# EAGLE board matherBoard (EAGLE 9.3.1)
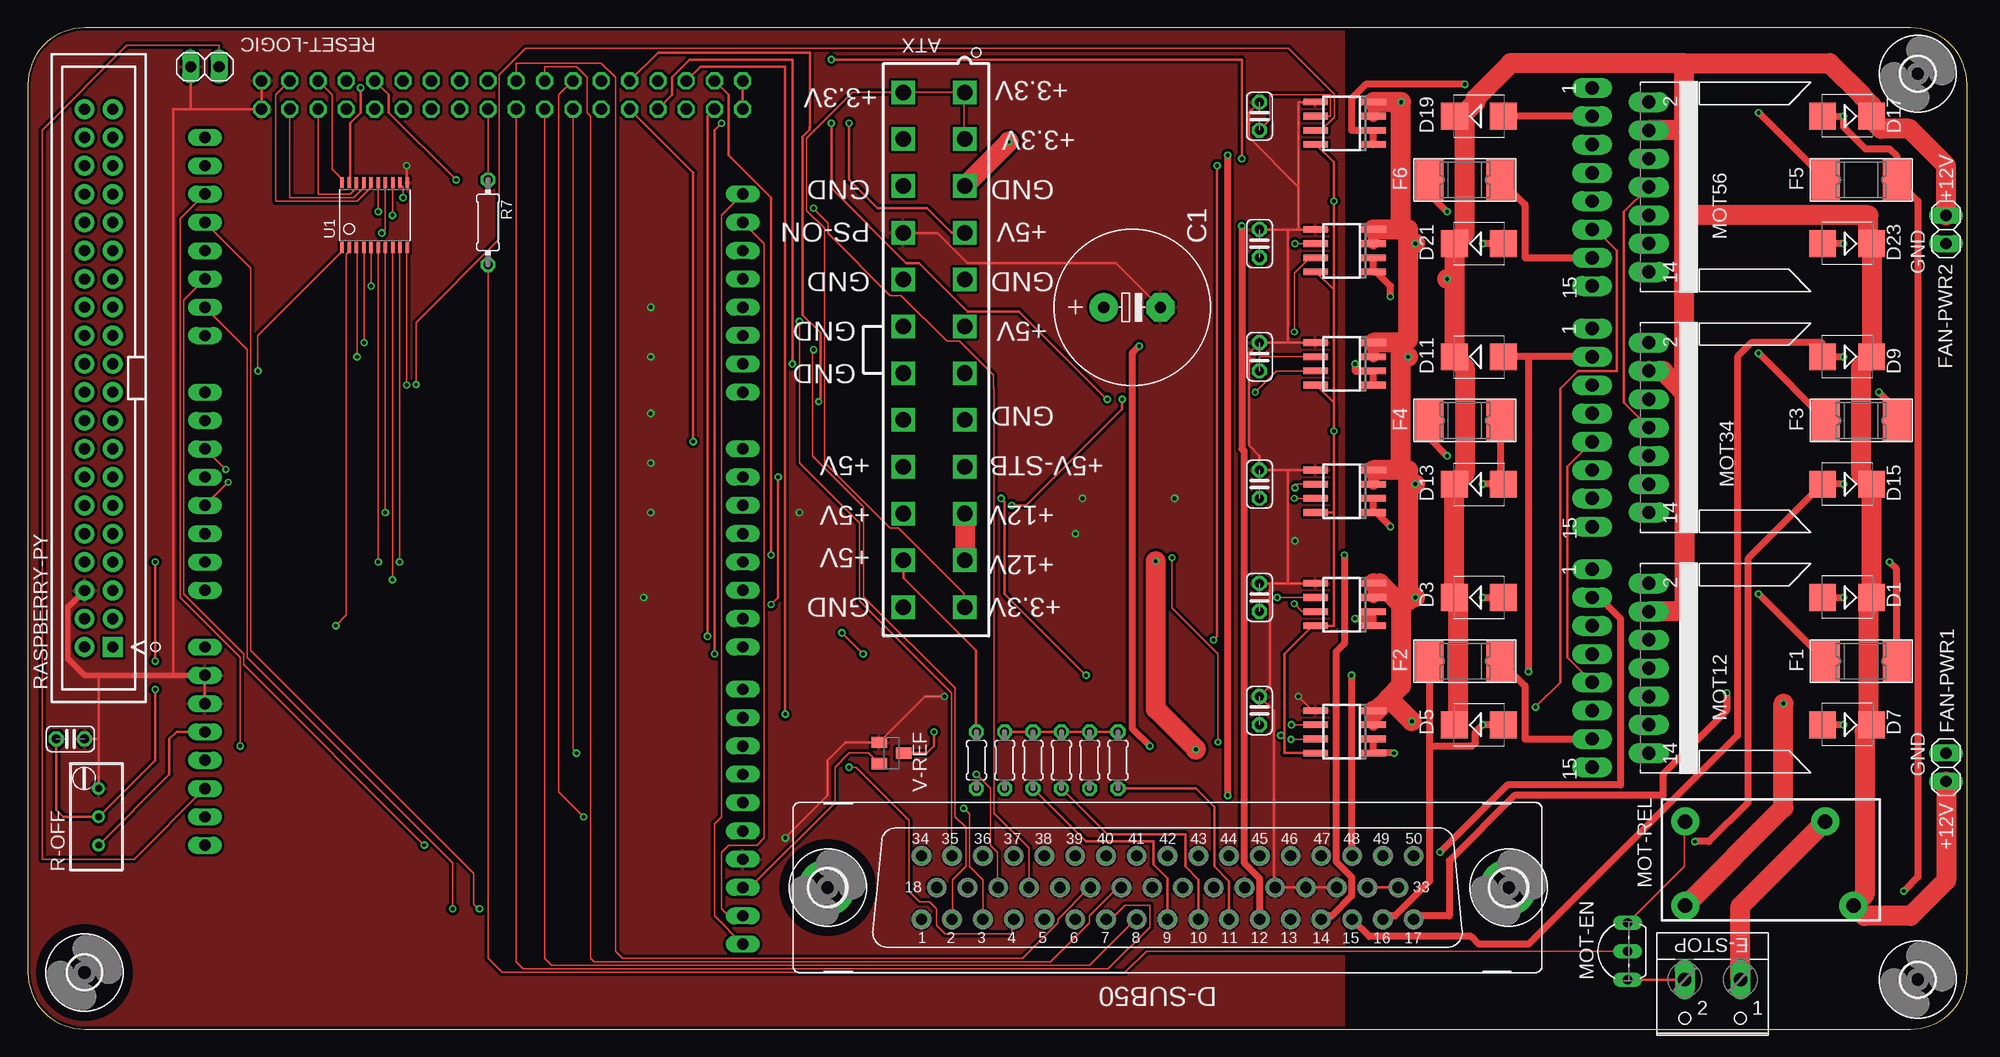
[diagram p0: board, top side]
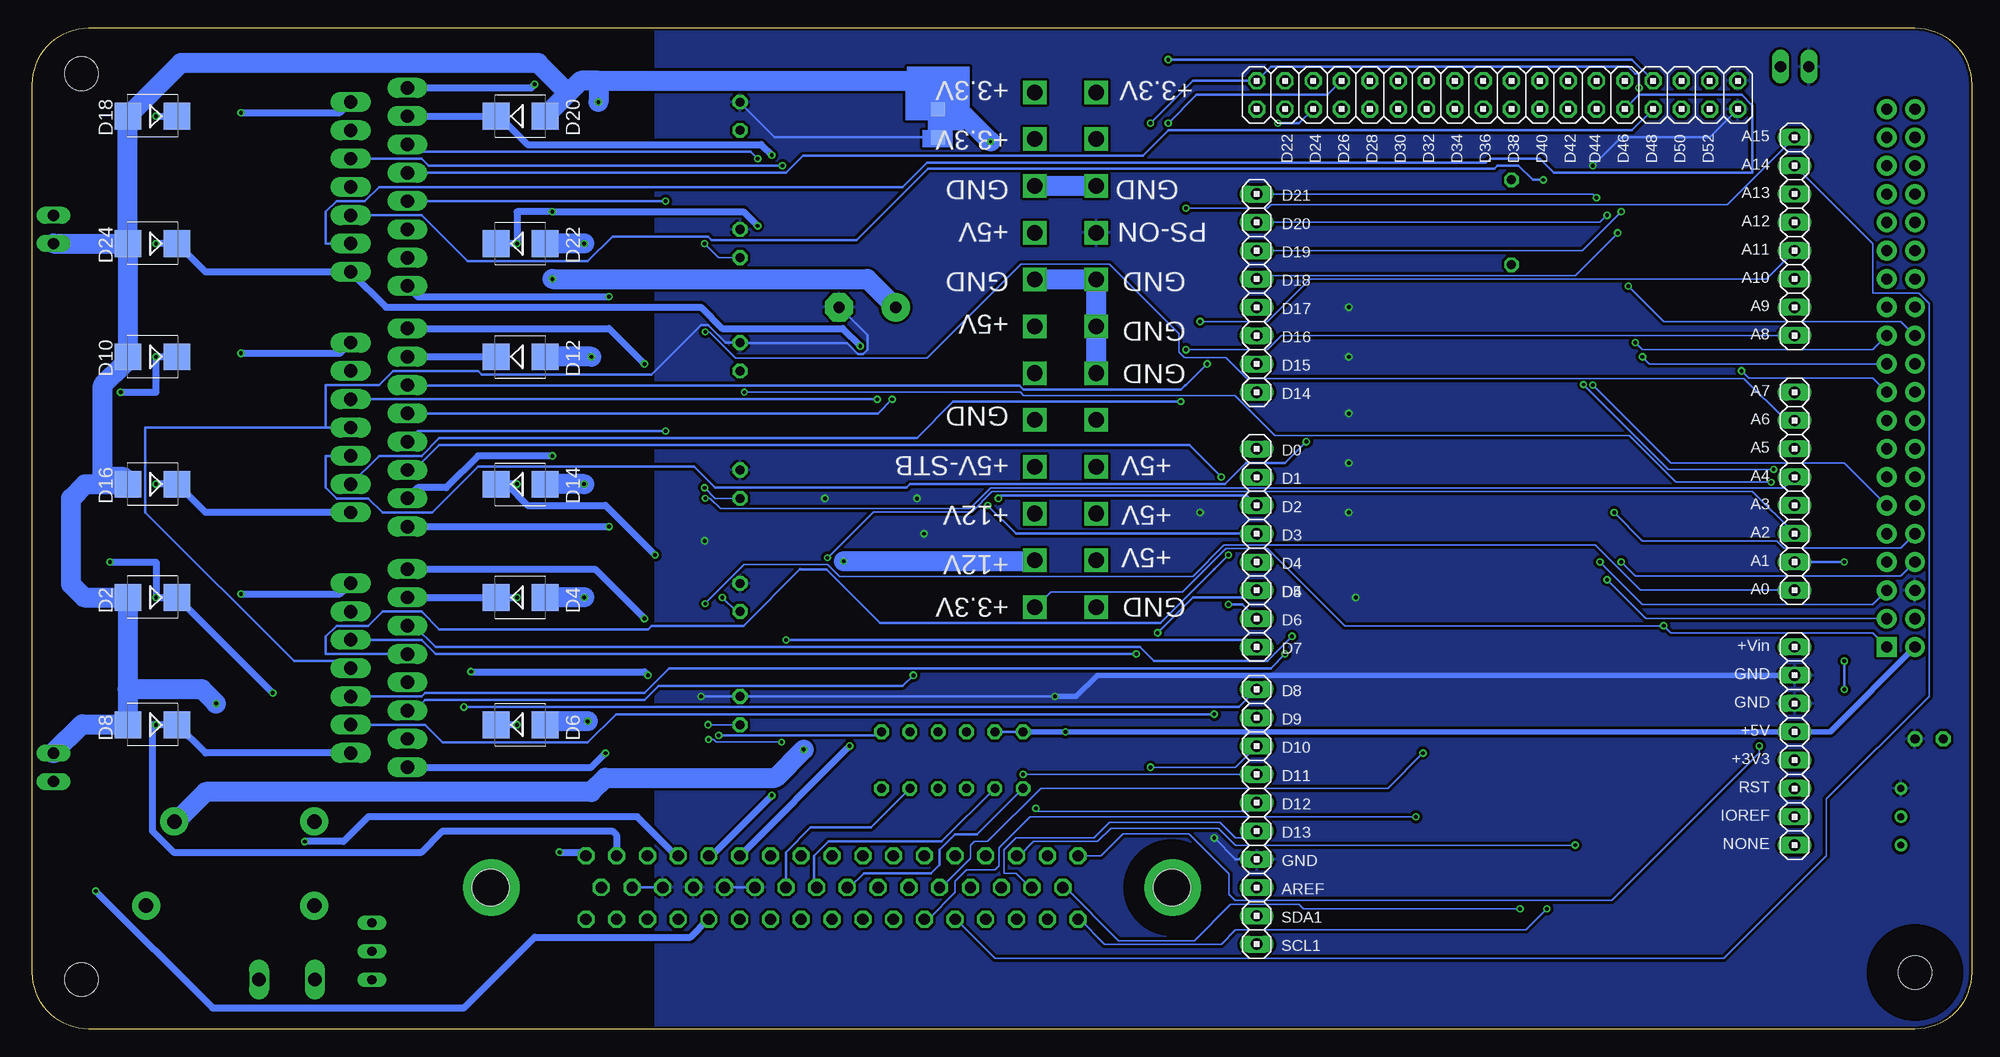
[diagram p1: board, bottom side, seen from below]

Size 173.97 x 89.84 mm. Coordinates in mm from the lower left corner, seen from the top.
Outline: 168.89,89.84 5.08,89.84 arc90 0,84.76 0,5.08 arc90 5.08,0 168.89,0 arc90 173.97,5.08 173.97,84.76 arc90 168.89,89.84
Copper layers (1*16): Top 0.035mm / dielectric 1.5mm / Bottom 0.035mm
Design rules "SeeedStudio_2layer_DRU_no_angle_20140221": minimum track width 6mil, minimum drill 12mil, track to track 6mil, track to pad 6mil, pad to pad 6mil, via to via 6mil, smd to smd 0mil, copper to edge 10mil, drill to drill 10mil, minimum pad ring 10mil, minimum via ring 6mil, stop-mask expansion 2mil, vias tented up to drill 100mil, thermal gap 10mil
Net classes: 0 default: width 0.102 mm; 1 PowerJack: width 1.778 mm, clearance 0.254 mm; 2 PMot: width 0.635 mm, clearance 0.203 mm; 3 PLogic: width 0.203 mm

## Footprints (pad centres in the part's own frame; a part is rotated, then mirrored left to right if it is on the bottom)
MEGA-NO-HOLE = drill 1.016 long: +3V3 35.56,2.54; +5V2 38.1,2.54; A0 50.8,2.54; A1 53.34,2.54; A2 55.88,2.54; A3 58.42,2.54; A4 60.96,2.54; A5 63.5,2.54; A6 66.04,2.54; A7 68.58,2.54; A8 73.66,2.54; A9 76.2,2.54; A10 78.74,2.54; A11 81.28,2.54; A12 83.82,2.54; A13 86.36,2.54; A14 88.9,2.54; A15 91.44,2.54; AREF 24.13,50.8; D0 63.5,50.8; D1 60.96,50.8; D2 58.42,50.8; D3 55.88,50.8; D4 53.34,50.8; D5 50.8,50.8; D6 48.26,50.8; D7 45.72,50.8; D8 41.91,50.8; D9 39.37,50.8; D10 36.83,50.8; D11 34.29,50.8; D12 31.75,50.8; D13 29.21,50.8; D14 68.58,50.8; D15 71.12,50.8; D16 73.66,50.8; D17 76.2,50.8; D18 78.74,50.8; D19 81.28,50.8; D20 83.82,50.8; D21 86.36,50.8; GND 26.67,50.8; GND3 40.64,2.54; GND4 43.18,2.54; IOREF 30.48,2.54; NONE 27.94,2.54; RST 33.02,2.54; SCL1 19.05,50.8; SDA1 21.59,50.8; VIN 45.72,2.54 | drill 1.016 octagon: +5V 93.98,50.8; +5V1 96.52,50.8; D22 93.98,48.26; D23 96.52,48.26; D24 93.98,45.72; D25 96.52,45.72; D26 93.98,43.18; D27 96.52,43.18; D28 93.98,40.64; D29 96.52,40.64; D30 93.98,38.1; D31 96.52,38.1; D32 93.98,35.56; D33 96.52,35.56; D34 93.98,33.02; D35 96.52,33.02; D36 93.98,30.48; D37 96.52,30.48; D38 93.98,27.94; D39 96.52,27.94; D40 93.98,25.4; D41 96.52,25.4; D42 93.98,22.86; D43 96.52,22.86; D44 93.98,20.32; D45 96.52,20.32; D46 93.98,17.78; D47 96.52,17.78; D48 93.98,15.24; D49 96.52,15.24; D50 93.98,12.7; D51 96.52,12.7; D52 93.98,10.16; D53 96.52,10.16; GND1 96.52,7.62; GND2 93.98,7.62
5566-24 = drill 1.4 square: 1 23.1,-2.75; 2 18.9,-2.75; 3 14.7,-2.75; 4 10.5,-2.75; 5 6.3,-2.75; 6 2.1,-2.75; 7 -2.1,-2.75; 8 -6.3,-2.75; 9 -10.5,-2.75; 10 -14.7,-2.75; 11 -18.9,-2.75; 12 -23.1,-2.75; 13 23.1,2.75; 14 18.9,2.75; 15 14.7,2.75; 16 10.5,2.75; 17 6.3,2.75; 18 2.1,2.75; 19 -2.1,2.75; 20 -6.3,2.75; 21 -10.5,2.75; 22 -14.7,2.75; 23 -18.9,2.75; 24 -23.1,2.75
E5-13 = drill 1.016 pad 2.54: + -2.54,0 | drill 1.016 pad 2.54 octagon: - 2.54,0
C025-024X044 = drill 0.813 octagon: 1 -1.27,0; 2 1.27,0
SMB = smd 2.4 x 2.4: A 2.2,0; C -2.2,0
F50VP = drill 1.016 octagon: 1 -22.073,-2.845; 2 -19.329,-2.845; 3 -16.561,-2.845; 4 -13.792,-2.845; 5 -11.049,-2.845; 6 -8.28,-2.845; 7 -5.512,-2.845; 8 -2.769,-2.845; 9 0,-2.845; 10 2.769,-2.845; 11 5.512,-2.845; 12 8.28,-2.845; 13 11.049,-2.845; 14 13.792,-2.845; 15 16.561,-2.845; 16 19.329,-2.845; 17 22.073,-2.845; 18 -20.701,0; 19 -17.932,0; 20 -15.189,0; 21 -12.421,0; 22 -9.652,0; 23 -6.909,0; 24 -4.14,0; 25 -1.372,0; 26 1.372,0; 27 4.14,0; 28 6.909,0; 29 9.652,0; 30 12.421,0; 31 15.189,0; 32 17.932,0; 33 20.701,0; 34 -22.073,2.845; 35 -19.329,2.845; 36 -16.561,2.845; 37 -13.792,2.845; 38 -11.049,2.845; 39 -8.28,2.845; 40 -5.512,2.845; 41 -2.769,2.845; 42 0,2.845; 43 2.769,2.845; 44 5.512,2.845; 45 8.28,2.845; 46 11.049,2.845; 47 13.792,2.845; 48 16.561,2.845; 49 19.329,2.845; 50 22.073,2.845 | drill 3.302 pad 5.08: G1 30.556,0; G2 -30.556,0
W237-102 = drill 1.194 long: 1 -2.5,-1.27; 2 2.5,-1.27
BELFUSE0679-3000-12 = smd 2.5 x 3.81: 1 -3.175,0; 2 3.175,0
1X02 = drill 1.016 long: 1 -1.27,0; 2 1.27,0
3,0 = hole 3: 0,0
3,3 = hole 3.3: 0,0
SOIC8 = smd 0.6 x 2.2: 1 -1.905,-2.6; 2 -0.635,-2.6; 3 0.635,-2.6; 4 1.905,-2.6; 5 1.905,2.6; 6 0.635,2.6; 7 -0.635,2.6; 8 -1.905,2.6
MULTIWATT-15 = drill 1.2 long: 1 -8.89,-7.62; 2 -7.62,-2.54; 3 -6.35,-7.62; 4 -5.08,-2.54; 5 -3.81,-7.62; 6 -2.54,-2.54; 7 -1.27,-7.62; 8 0,-2.54; 9 1.27,-7.62; 10 2.54,-2.54; 11 3.81,-7.62; 12 5.08,-2.54; 13 6.35,-7.62; 14 7.62,-2.54; 15 8.89,-7.62
TO92-CBE = drill 0.813 long: B 0,0; C -2.54,0; E 2.54,0
RP53 = drill 1.3 pad 2.5: 11 8.185,-4.161; 14 5.665,3.399; A1 -6.895,-4.161; A2 -6.895,3.399
0204/5 = drill 0.813 octagon: 1 -2.54,0; 2 2.54,0
0204/7 = drill 0.813 octagon: 1 -3.81,0; 2 3.81,0
RTRIMT93YA = drill 0.61: 1 0,-2.54; 2 0,0; 3 0,2.54
RASPI_GPIO_B+_BOX = drill 1 pad 1.778 square: 1 -24.13,-1.27 | drill 1 pad 1.778: 2 -24.13,1.27; 3 -21.59,-1.27; 4 -21.59,1.27; 5 -19.05,-1.27; 6 -19.05,1.27; 7 -16.51,-1.27; 8 -16.51,1.27; 9 -13.97,-1.27; 10 -13.97,1.27; 11 -11.43,-1.27; 12 -11.43,1.27; 13 -8.89,-1.27; 14 -8.89,1.27; 15 -6.35,-1.27; 16 -6.35,1.27; 17 -3.81,-1.27; 18 -3.81,1.27; 19 -1.27,-1.27; 20 -1.27,1.27; 21 1.27,-1.27; 22 1.27,1.27; 23 3.81,-1.27; 24 3.81,1.27; 25 6.35,-1.27; 26 6.35,1.27; 27 8.89,-1.27; 28 8.89,1.27; 29 11.43,-1.27; 30 11.43,1.27; 31 13.97,-1.27; 32 13.97,1.27; 33 16.51,-1.27; 34 16.51,1.27; 35 19.05,-1.27; 36 19.05,1.27; 37 21.59,-1.27; 38 21.59,1.27; 39 24.13,-1.27; 40 24.13,1.27
TSSOP20 = smd 0.305 x 0.991: 1 -2.925,-2.918; 2 -2.275,-2.918; 3 -1.625,-2.918; 4 -0.975,-2.918; 5 -0.325,-2.918; 6 0.325,-2.918; 7 0.975,-2.918; 8 1.625,-2.918; 9 2.275,-2.918; 10 2.925,-2.918; 11 2.925,2.918; 12 2.275,2.918; 13 1.625,2.918; 14 0.975,2.918; 15 0.325,2.918; 16 -0.325,2.918; 17 -0.975,2.918; 18 -1.625,2.918; 19 -2.275,2.918; 20 -2.925,2.918
SOT23 = smd 1 x 1.4: 1 -0.95,-1.1; 2 0.95,-1.1; 3 0,1.1
GND-GNDA-1,27MM = smd 1.27 x 1.27: GND -1.27,0; GNDA 1.27,0

## Placement (x,y rotation side)
ARDUINO_MEGA_1  MEGA_ARDUINONO-HOLE  [MEGA-NO-HOLE]  13.34,-11.43 90 bottom
ATX  ATX_MOLEX-CON24PIN  [5566-24]  81.28,60.96 90 top
C1  1mF  [E5-13]  99.06,64.77 0 top
C2  1n  [C025-024X044]  3.81,26.04 0 top
C3  1n  [C025-024X044]  110.49,38.73 270 top
C4  1n  [C025-024X044]  110.49,28.57 90 top
C6  1n  [C025-024X044]  110.49,60.33 270 top
C7  1n  [C025-024X044]  110.49,48.9 90 top
C8  1n  [C025-024X044]  110.49,81.92 270 top
C9  1n  [C025-024X044]  110.49,70.48 90 top
D1  ES2D  [SMB]  163.19,38.73 180 top
D2  ES2D  [SMB]  163.19,38.73 180 bottom
D3  ES2D  [SMB]  130.18,38.73 0 top
D4  ES2D  [SMB]  130.18,38.73 0 bottom
D5  ES2D  [SMB]  130.18,27.3 0 top
D6  ES2D  [SMB]  130.18,27.3 0 bottom
D7  ES2D  [SMB]  163.19,27.3 180 top
D8  ES2D  [SMB]  163.19,27.3 180 bottom
D9  ES2D  [SMB]  163.19,60.33 180 top
D10  ES2D  [SMB]  163.19,60.33 180 bottom
D11  ES2D  [SMB]  130.18,60.33 0 top
D12  ES2D  [SMB]  130.18,60.33 0 bottom
D13  ES2D  [SMB]  130.18,48.9 0 top
D14  ES2D  [SMB]  130.18,48.9 0 bottom
D15  ES2D  [SMB]  163.19,48.9 180 top
D16  ES2D  [SMB]  163.19,48.9 180 bottom
D17  ES2D  [SMB]  163.19,81.92 180 top
D18  ES2D  [SMB]  163.19,81.92 180 bottom
D19  ES2D  [SMB]  130.18,81.92 0 top
D20  ES2D  [SMB]  130.18,81.92 0 bottom
D21  ES2D  [SMB]  130.18,70.48 0 top
D22  ES2D  [SMB]  130.18,70.48 0 bottom
D23  ES2D  [SMB]  163.19,70.48 180 top
D24  ES2D  [SMB]  163.19,70.48 180 bottom
D-SUB50  [F50VP]  102.23,12.7 0 top
E-STOP  [W237-102]  151.13,3.17 180 top
F1  2410-BOX  [BELFUSE0679-3000-12]  164.47,33.02 180 top
F2  2410-BOX  [BELFUSE0679-3000-12]  128.91,33.02 0 top
F3  2410-BOX  [BELFUSE0679-3000-12]  164.47,54.61 180 top
F4  2410-BOX  [BELFUSE0679-3000-12]  128.91,54.61 180 top
F5  2410-BOX  [BELFUSE0679-3000-12]  164.47,76.2 180 top
F6  2410-BOX  [BELFUSE0679-3000-12]  128.91,76.2 0 top
FAN-PWR1  [1X02]  172.09,23.5 90 top
FAN-PWR2  [1X02]  172.09,71.75 270 top
H1  MOUNT-HOLE3.0  [3,0]  169.54,85.72 0 top
H2  MOUNT-HOLE3.0  [3,0]  169.54,4.45 0 top
H3  MOUNT-HOLE3.0  [3,0]  5.08,5.08 0 top
HD-SUB1  MOUNT-HOLE3.3  [3,3]  71.75,12.7 0 top
HD-SUB2  MOUNT-HOLE3.3  [3,3]  132.84,12.7 0 top
IC2  ACS712-LC  [SOIC8]  118.11,38.1 90 top
IC3  ACS712-LC  [SOIC8]  118.11,26.67 90 top
IC5  ACS712-LC  [SOIC8]  118.11,59.69 90 top
IC6  ACS712-LC  [SOIC8]  118.11,48.26 90 top
IC8  ACS712-LC  [SOIC8]  118.11,81.28 90 top
IC9  ACS712-LC  [SOIC8]  118.11,69.85 90 top
MOT12  L298  [MULTIWATT-15]  147.96,32.38 270 top
MOT34  L298  [MULTIWATT-15]  147.96,53.98 270 top
MOT56  L298  [MULTIWATT-15]  147.96,75.56 270 top
MOT-EN  [TO92-CBE]  143.51,6.99 90 top
MOT-REL  RP530006  [RP53]  155.57,15.24 0 top
R1  39  [0204/5]  97.79,24.13 270 top
R2  39  [0204/5]  95.25,24.13 270 top
R3  39  [0204/5]  92.71,24.13 270 top
R4  39  [0204/5]  87.63,24.13 270 top
R5  39  [0204/5]  90.17,24.13 270 top
R6  39  [0204/5]  85.09,24.13 270 top
R7  4.7K  [0204/7]  41.27,72.39 270 top
R-OFF  5k  [RTRIMT93YA]  6.35,19.05 0 top
RASPBERRY-PY  RASPI_GPIO_B+_BOX  [RASPI_GPIO_B+_BOX]  6.35,58.42 90 top
RESET-LOGIC  [1X02]  15.88,86.36 180 top
U1  TXB0108PWR  [TSSOP20]  31.11,73.03 0 top
V-REF  2.5V  [SOT23]  77.47,24.77 270 top
~NUDEV~1  GND-GNDA1,27MM  [GND-GNDA-1,27MM]  92.71,81.28 90 bottom

## Library data of the parts
ARDUINO_MEGA_1 = ARDUINO_DODO
ATX = Personal
C1-C4 C6-C9 = rcl; SPICEPREFIX: C
D1-D24 = diode
D-SUB50 = con-subd; OC_FARNELL: unknown; OC_NEWARK: unknown
E-STOP = con-wago-500; MPN: 237-102; OC_FARNELL: unknown; OC_NEWARK: 70K9898
F1-F6 = polyfuse-smd_10
FAN-PWR1 FAN-PWR2 RESET-LOGIC = pinhead
H1-H3 HD-SUB1 HD-SUB2 = holes
IC2 IC3 IC5 IC6 IC8 IC9 = allegro-2
MOT12 MOT34 MOT56 = st-microelectronics; MPN: L298N; OC_FARNELL: 1589425; OC_NEWARK: 32M1527
MOT-EN = transistor
MOT-REL = relay; OC_FARNELL: unknown; OC_NEWARK: unknown
R1-R7 = rcl; SPICEPREFIX: R
R-OFF = rcl; SPICEMODEL: X; SPICEPREFIXL: POT
RASPBERRY-PY = raspberrypi_bastelstube_v13
U1 = TXB0108PWR; AVAILABILITY: Unavailable; DESCRIPTION: 8-Bit Bidirectional Voltage-Level Translator with Auto Direction Sensing and +/-15-kV ESD Protect 20-TSSOP -40 to 85; MF: Texas Instruments; MP: TXB0108PWR; PACKAGE: TSSOP-20 Texas Instruments; PRICE: None
V-REF = v-reg
~NUDEV~1 = ground-junctions

## Nets
+3V3: ATX.1 ATX.2 ATX.12 ATX.13 RASPBERRY-PY.1 U1.2
+5V [PLogic]: ARDUINO_MEGA_1.+5V ARDUINO_MEGA_1.+5V1 ARDUINO_MEGA_1.+5V2 ATX.4 ATX.6 ATX.21 ATX.22 ATX.23 IC2.8 IC3.8 IC5.8 IC6.8 IC8.8 IC9.8 MOT12.9 MOT34.9 MOT56.9 R1.1 R2.1 R3.1 R4.1 R5.1 R6.1 R-OFF.1 RASPBERRY-PY.2 U1.19 V-REF.3
AR-ARX/PTX: ARDUINO_MEGA_1.D19 U1.15
AR-ATX/PRX: ARDUINO_MEGA_1.D18 U1.14
AR-MISO: ARDUINO_MEGA_1.D50 U1.18
AR-MOSI: ARDUINO_MEGA_1.D51 U1.20
AR-SCK: ARDUINO_MEGA_1.D52 U1.17
AR-SCL: ARDUINO_MEGA_1.D21 ARDUINO_MEGA_1.SCL1 U1.12
AR-SDA: ARDUINO_MEGA_1.D20 ARDUINO_MEGA_1.SDA1 U1.13
AR-SS: ARDUINO_MEGA_1.D53 U1.16
CHA1: ARDUINO_MEGA_1.A8 D-SUB50.2
CHA2: ARDUINO_MEGA_1.A9 D-SUB50.1
CHA3: ARDUINO_MEGA_1.A10 D-SUB50.36
CHA4: ARDUINO_MEGA_1.A11 D-SUB50.35
CHA5: ARDUINO_MEGA_1.A12 D-SUB50.18
CHA6: ARDUINO_MEGA_1.A13 D-SUB50.34
CHB1: ARDUINO_MEGA_1.A14 D-SUB50.5
CHB2: ARDUINO_MEGA_1.A15 D-SUB50.21
CHB3: ARDUINO_MEGA_1.D10 D-SUB50.4
CHB4: ARDUINO_MEGA_1.D11 D-SUB50.20
CHB5: ARDUINO_MEGA_1.D12 D-SUB50.3
CHB6: ARDUINO_MEGA_1.D13 D-SUB50.19
COM-ENABLE: RASPBERRY-PY.11 U1.10
GND [PLogic]: ARDUINO_MEGA_1.GND ARDUINO_MEGA_1.GND1 ARDUINO_MEGA_1.GND2 ARDUINO_MEGA_1.GND3 ARDUINO_MEGA_1.GND4 ATX.16 C1.- C2.2 C3.1 C4.2 C6.1 C7.2 C8.1 C9.2 D-SUB50.28 D-SUB50.29 D-SUB50.30 D-SUB50.31 D-SUB50.32 D-SUB50.33 IC2.5 IC3.5 IC5.5 IC6.5 IC8.5 IC9.5 MOT12.8 MOT34.8 MOT56.8 R-OFF.3 RASPBERRY-PY.6 RESET-LOGIC.2 U1.11 V-REF.1 ~NUDEV~1.GND
GNDA [PowerJack]: ATX.3 ATX.5 ATX.8 ATX.15 ATX.17 ATX.18 ATX.19 ATX.24 D2.A D4.A D6.A D8.A D10.A D12.A D14.A D16.A D18.A D20.A D22.A D24.A FAN-PWR1.2 FAN-PWR2.2 IC2.3 IC2.4 IC3.3 IC3.4 IC5.3 IC5.4 IC6.3 IC6.4 IC8.3 IC8.4 IC9.3 IC9.4 MOT-REL.A1 ~NUDEV~1.GNDA
IM1V: ARDUINO_MEGA_1.A0 IC2.7
IM2V: ARDUINO_MEGA_1.A2 IC3.7
IM3V: ARDUINO_MEGA_1.A3 IC5.7
IM4V: ARDUINO_MEGA_1.A4 IC6.7
IM5V: ARDUINO_MEGA_1.A5 IC8.7
IM6V: ARDUINO_MEGA_1.A6 IC9.7
IN1A [PLogic]: ARDUINO_MEGA_1.D22 MOT12.5
IN1B [PLogic]: ARDUINO_MEGA_1.D23 MOT12.7
IN2A [PLogic]: ARDUINO_MEGA_1.D24 MOT12.10
IN2B [PLogic]: ARDUINO_MEGA_1.D25 MOT12.12
IN3A [PLogic]: ARDUINO_MEGA_1.D26 MOT34.5
IN3B [PLogic]: ARDUINO_MEGA_1.D27 MOT34.7
IN4A [PLogic]: ARDUINO_MEGA_1.D28 MOT34.10
IN4B [PLogic]: ARDUINO_MEGA_1.D29 MOT34.12
IN5A [PLogic]: ARDUINO_MEGA_1.D49 MOT56.5
IN5B [PLogic]: ARDUINO_MEGA_1.D48 MOT56.7
IN6A [PLogic]: ARDUINO_MEGA_1.D47 MOT56.10
IN6B [PLogic]: ARDUINO_MEGA_1.D46 MOT56.12
M1+ [PMot]: D1.A D2.C D-SUB50.17 F1.1
M1- [PMot]: D3.A D4.C D-SUB50.50 MOT12.3
M1-FUSE [PMot]: F1.2 MOT12.2
M2+ [PMot]: D5.A D6.C D-SUB50.16 F2.1
M2- [PMot]: D7.A D8.C D-SUB50.49 MOT12.14
M2-FUSE [PMot]: F2.2 MOT12.13
M3+ [PMot]: D9.A D10.C D-SUB50.15 F3.1
M3- [PMot]: D11.A D12.C D-SUB50.48 MOT34.3
M3-FUSE [PMot]: F3.2 MOT34.2
M4+ [PMot]: D13.A D14.C D-SUB50.14 F4.1
M4- [PMot]: D15.A D16.C D-SUB50.47 MOT34.14
M4-FUSE [PMot]: F4.2 MOT34.13
M5+ [PMot]: D17.A D18.C D-SUB50.13 F5.1
M5- [PMot]: D19.A D20.C D-SUB50.46 MOT56.3
M5-FUSE [PMot]: F5.2 MOT56.2
M6+ [PMot]: D21.A D22.C D-SUB50.12 F6.1
M6- [PMot]: D23.A D24.C D-SUB50.45 MOT56.14
M6-FUSE [PMot]: F6.2 MOT56.13
MOT-EN: ARDUINO_MEGA_1.D38 R7.1
MS1: ARDUINO_MEGA_1.D37 D-SUB50.23
MS2: ARDUINO_MEGA_1.D36 D-SUB50.7
MS3: ARDUINO_MEGA_1.D35 D-SUB50.24
MS4: ARDUINO_MEGA_1.D34 D-SUB50.8
MS5: ARDUINO_MEGA_1.D33 D-SUB50.6
MS6: ARDUINO_MEGA_1.D32 D-SUB50.22
N$1 [PLogic]: E-STOP.2 MOT-EN.C
N$2: MOT-EN.B R7.2
N$3: MOT-EN.E MOT-REL.A2
N$4: C3.2 IC2.6
N$5: ARDUINO_MEGA_1.RST RESET-LOGIC.1
N$6: C4.1 IC3.6
N$9: C6.2 IC5.6
N$10: C7.1 IC6.6
N$13: C8.2 IC8.6
N$14: C9.1 IC9.6
PWM1 [PLogic]: ARDUINO_MEGA_1.D5 MOT12.6
PWM2 [PLogic]: ARDUINO_MEGA_1.D2 MOT12.11
PWM3 [PLogic]: ARDUINO_MEGA_1.D3 MOT34.6
PWM4 [PLogic]: ARDUINO_MEGA_1.D6 MOT34.11
PWM5 [PLogic]: ARDUINO_MEGA_1.D7 MOT56.6
PWM6 [PLogic]: ARDUINO_MEGA_1.D8 MOT56.11
RP-ARX/PTX: RASPBERRY-PY.8 U1.6
RP-ATX/PRX: RASPBERRY-PY.10 U1.7
RP-MISO: RASPBERRY-PY.21 U1.3
RP-MOSI: RASPBERRY-PY.19 U1.1
RP-SCK: RASPBERRY-PY.23 U1.4
RP-SCL: RASPBERRY-PY.5 U1.9
RP-SDA: RASPBERRY-PY.3 U1.8
RP-SS: RASPBERRY-PY.24 U1.5
SEN_1 [PMot]: IC2.1 IC2.2 MOT12.1
SEN_2 [PMot]: IC3.1 IC3.2 MOT12.15
SEN_3 [PMot]: IC5.1 IC5.2 MOT34.1
SEN_4 [PMot]: IC6.1 IC6.2 MOT34.15
SEN_5 [PMot]: IC8.1 IC8.2 MOT56.1
SEN_6 [PMot]: IC9.1 IC9.2 MOT56.15
V+ [PowerJack]: ATX.10 ATX.11 E-STOP.1 MOT-REL.14
V-OFF: ARDUINO_MEGA_1.A1 C2.1 R-OFF.2
V-REF: ARDUINO_MEGA_1.AREF V-REF.2
VDD [PowerJack]: C1.+ D1.C D3.C D5.C D7.C D9.C D11.C D13.C D15.C D17.C D19.C D21.C D23.C FAN-PWR1.1 FAN-PWR2.1 MOT12.4 MOT34.4 MOT56.4 MOT-REL.11
VLED1 [PLogic]: D-SUB50.11 R1.2
VLED2 [PLogic]: D-SUB50.27 R2.2
VLED3 [PLogic]: D-SUB50.10 R3.2
VLED4 [PLogic]: D-SUB50.26 R4.2
VLED5 [PLogic]: D-SUB50.9 R5.2
VLED6 [PLogic]: D-SUB50.25 R6.2

## Tracks (layer width: path | path; a pad name or v marks a point on that pad's centre or on a via)
+3V3  (via drill 0.35)
  Top 0.152: v27.62,36.2 28.57,37.15 28.57,69.53 28.89,69.85 U1.2 | ATX.12 83.97,37.87 83.97,39.09 78.11,44.96 77.34,44.96 71.48,50.83 71.48,71.86 69.88,73.46 69.88,79.93 73.99,84.05 78.49,84.05 ATX.13 78.56,84.05 83.97,84.05 ATX.1 83.97,83.97 83.97,79.93 ATX.2
  Bottom 0.152: RASPBERRY-PY.1 8.89,35.56 26.99,35.56 v27.62,36.2 56.24,36.2 63.17,43.13 66.9,43.13 70.79,39.24 82.6,39.24 83.97,37.87 ATX.12
+5V  (via drill 0.35)
  Top 0.203: MOT12.9 138.11,33.34 138.11,50.48 MOT34.9 | IC3.8 112.71,24.77 112.71,26.35 | 112.71,26.35 112.71,33.66 115.25,36.2 IC2.8 117.16,36.2 117.16,46.35 | 117.16,46.35 IC6.8 | 117.16,56.2 v117.16,53.66 117.16,46.35 | 117.16,56.2 115.57,57.78 IC5.8 | 117.16,66.36 115.57,67.94 IC9.8 | 117.16,56.2 117.16,66.36 | 117.16,66.36 v117.16,74.3 117.16,77.79 115.57,79.38 IC8.8 | v29.84,84.45 29.84,82.23 28.89,81.28 28.89,76.2 U1.19 | ARDUINO_MEGA_1.+5V1 ARDUINO_MEGA_1.+5V | R4.1 R5.1 R3.1 R2.1 R1.1 | v112.39,26.35 112.71,26.35 | V-REF.3 80.64,24.77 81.28,25.4 v81.28,26.67 | R-OFF.1 12.7,22.86 12.7,26.04 13.34,26.67 ARDUINO_MEGA_1.+5V2 | ATX.23 78.56,41.99 78.56,40.46 85.04,33.98 85.04,26.67 R6.1 | ATX.4 82.84,71.46 80.64,73.66 76.2,73.66 73.66,76.2 v73.66,81.28
  Bottom 0.203: v117.16,74.3 MOT56.9 | MOT34.9 139.38,53.66 v117.16,53.66 | v29.84,84.45 29.84,85.72 30.16,85.72 30.8,86.36 62.87,86.36 ARDUINO_MEGA_1.+5V1 69.85,85.09 v73.66,81.28 | R6.1 R4.1 | v112.39,26.35 98.11,26.35 R1.1
  Bottom 0.508: RASPBERRY-PY.2 12.7,26.67 ARDUINO_MEGA_1.+5V2 v81.28,26.67 R6.1
AR-ARX/PTX  (via drill 0.35)
  Top 0.152: v31.43,73.34 31.43,75.88 U1.15
  Bottom 0.152: v31.43,73.34 34.92,69.85 ARDUINO_MEGA_1.D19
AR-ATX/PRX  (via drill 0.35)
  Top 0.152: v31.75,71.44 32.07,71.75 32.07,75.88 U1.14
  Bottom 0.152: v31.75,71.44 35.56,67.63 63.82,67.63 ARDUINO_MEGA_1.D18
AR-MISO
  Top 0.152: ARDUINO_MEGA_1.D50 26.04,74.93 28.89,74.93 29.53,75.56 29.53,75.88 U1.18
AR-MOSI
  Top 0.152: ARDUINO_MEGA_1.D51 27.3,83.82 27.3,77.15 28.26,76.2 U1.20
AR-SCK
  Top 0.152: ARDUINO_MEGA_1.D52 23.5,74.61 29.21,74.61 30.16,75.56 30.16,75.88 U1.17
AR-SCL  (via drill 0.35)
  Top 0.152: v33.66,74.61 33.66,75.56 33.34,75.88 U1.12 | ARDUINO_MEGA_1.D21 62.23,73.03 62.23,19.05 61.59,18.41 61.59,10.16 ARDUINO_MEGA_1.SCL1
  Bottom 0.152: v33.66,74.61 33.97,74.93 ARDUINO_MEGA_1.D21
AR-SDA  (via drill 0.35)
  Top 0.152: v32.7,73.03 32.7,75.88 U1.13 | ARDUINO_MEGA_1.D20 66.04,70.48 66.04,17.14 65.41,16.51 62.87,16.51 62.23,15.88 62.23,10.79 62.87,10.16 ARDUINO_MEGA_1.SDA1
  Bottom 0.152: v32.7,73.03 33.34,72.39 ARDUINO_MEGA_1.D20
AR-SS
  Top 0.152: ARDUINO_MEGA_1.D53 22.23,83.82 22.23,74.3 29.53,74.3 30.8,75.56 30.8,75.88 U1.16
CHA1  (via drill 0.35)
  Top 0.152: D-SUB50.2 82.93,9.88 82.93,13.4 84.14,14.61 84.14,18.1 83.19,19.05 83.19,30.53 83.21,30.56 74.98,38.79 74.98,46.86 70.41,51.44 70.41,60.88 v70.48,60.96
  Bottom 0.152: ARDUINO_MEGA_1.A8 61.91,62.23 63.18,60.96 v70.48,60.96
CHA2  (via drill 0.35)
  Top 0.152: ARDUINO_MEGA_1.A9 19.68,60.96 19.68,33.34 38.1,14.92 v38.1,10.79
  Bottom 0.152: D-SUB50.1 80.01,9.84 77.79,7.62 67.31,7.62 66.04,8.89 40.01,8.89 v38.1,10.79
CHA3  (via drill 0.35)
  Top 0.152: ARDUINO_MEGA_1.A10 13.97,65.41 13.97,39.05 19.37,33.66 19.37,32.7 v35.56,16.51
  Bottom 0.152: v35.56,16.51 66.04,16.51 67.56,18.03 77.22,18.03 78.42,16.83 84.14,16.83 85.41,15.56 D-SUB50.36
CHA4  (via drill 0.35)
  Top 0.152: v69.22,63.5 69.22,50.8 74.61,45.4 74.61,38.42 82.87,30.16 82.87,15.56 D-SUB50.35
  Bottom 0.152: ARDUINO_MEGA_1.A11 18.41,67.31 59.37,67.31 63.18,63.5 v69.22,63.5
CHA5  (via drill 0.35)
  Top 0.152: ARDUINO_MEGA_1.A12 20,68.26 20,33.97 40.01,13.97 40.01,11.18 40.39,10.79 v40.51,10.79
  Bottom 0.152: D-SUB50.18 81.28,12.7 76.52,7.94 69.72,7.94 66.48,11.18 60.33,11.18 59.94,10.79 v40.51,10.79
CHA6  (via drill 0.35)
  Top 0.152: ARDUINO_MEGA_1.A13 13.65,72.71 13.65,38.73 19.05,33.34 v19.05,25.4
  Bottom 0.152: v19.05,25.4 19.05,24.77 32.26,11.56 66.1,11.56 66.64,12.1 66.64,13.94 70.23,17.53 76.14,17.53 78.11,15.56 80.01,15.56 D-SUB50.34
CHB1
  Bottom 0.152: ARDUINO_MEGA_1.A14 8.89,70.48 8.89,66.04 4.76,66.04 3.81,65.09 3.81,29.84 13.02,20.64 13.02,15.56 22.23,6.35 87.63,6.35 91.12,9.84 D-SUB50.5
CHB2  (via drill 0.35)
  Top 0.152: D-SUB50.21 89.79,12.7 89.79,16.26 86.68,19.37 86.68,57.47 86.64,57.53 86.64,58.67 83.59,61.72 82.45,61.72 78.33,65.84 77.34,65.84 71.78,71.4 71.78,72.31 70.48,73.61 v70.48,73.66
  Bottom 0.152: ARDUINO_MEGA_1.A15 21.91,73.98 62.87,73.98 63.18,73.66 v70.48,73.66
CHB3  (via drill 0.35)
  Top 0.152: v73.66,23.5 74.3,23.5 79.06,18.73 79.06,12.38 80.01,11.43 80.9,11.43 81.53,10.79 81.53,9.34 82.3,8.57 88.27,8.57 88.27,9.84 D-SUB50.4
  Bottom 0.152: ARDUINO_MEGA_1.D10 66.04,23.5 v73.66,23.5
CHB4  (via drill 0.35)
  Top 0.152: v85.09,22.86 86.36,21.59 86.36,16.51 87,15.88 87,12.7 D-SUB50.20
  Bottom 0.152: v85.09,22.86 ARDUINO_MEGA_1.D11
CHB5  (via drill 0.35)
  Top 0.152: v83.95,19.81 84.45,19.3 84.45,14.61 85.66,13.4 D-SUB50.3
  Bottom 0.152: ARDUINO_MEGA_1.D12 64.9,19.56 83.69,19.56 v83.95,19.81
CHB6
  Bottom 0.152: ARDUINO_MEGA_1.D13 64.77,17.14 66.04,17.14 67.44,18.54 77.34,18.54 78.74,17.14 85.72,17.14 86.81,16.07 86.81,13.97 85.72,13.97 84.45,12.7 D-SUB50.19
COM-ENABLE  (via drill 0.35)
  Top 0.152: v33.97,57.78 33.97,69.85 U1.10
  Bottom 0.152: v33.97,57.78 26.99,50.8 11.43,50.8 RASPBERRY-PY.11
GND  (via drill 0.35)
  Top 0.203: v33.97,77.47 33.97,76.2 U1.11 | ARDUINO_MEGA_1.GND1 ARDUINO_MEGA_1.GND2 14.61,82.55 | ARDUINO_MEGA_1.GND4 ARDUINO_MEGA_1.GND3 | 14.61,82.55 13.02,82.55 13.02,31.75 | MOT56.8 143.19,73.34 143.19,56.2 MOT34.8 | 113.03,61.59 C6.1 109.54,60.64 109.54,52.39 110.49,51.44 C7.2 113.03,50.16 | 113.03,61.59 IC5.5 | C9.2 113.03,71.75 | 113.03,71.75 113.98,71.75 | 113.98,71.75 IC9.5 | IC8.5 113.98,83.19 113.98,75.56 | 113.98,71.75 113.98,75.56 | C8.1 109.54,82.23 109.54,80.01 113.98,75.56 | 113.03,71.75 113.03,61.59 | D-SUB50.33 D-SUB50.32 | D-SUB50.31 D-SUB50.30 D-SUB50.29 111.76,12.7 111.76,28.57 C4.2 111.44,30.8 111.44,40.01 | v113.98,29.84 115.25,28.57 IC3.5 | C3.1 111.44,40.01 | 111.44,40.01 113.03,40.01 | 113.03,40.01 IC2.5 | 113.03,50.16 IC6.5 | 113.03,50.16 113.03,40.01 | v67.94,17.14 71.75,20.95 71.75,24.13 73.34,25.71 V-REF.1 80.5,29.84 v82.23,29.84 | R-OFF.3 6.35,26.04 | 6.35,26.04 6.35,31.75 | C2.2 6.35,26.04 | ATX.16 78.56,71.4 81.61,71.4 84.28,68.73 97.61,68.73 101.58,64.77 C1.- | 14.61,82.55 RESET-LOGIC.2
  Top 0.508: RASPBERRY-PY.6 3.56,37.85 3.56,33.27 5.08,31.75 6.35,31.75 13.02,31.75 ARDUINO_MEGA_1.GND4
  Bottom 0.203: v33.97,77.47 31.43,80.01 23.5,80.01 ARDUINO_MEGA_1.GND2 | MOT12.8 146.05,33.02 150.5,33.02 163.83,46.35 163.83,53.98 147.64,53.98 | MOT34.8 147.64,53.98 | v67.94,17.14 66.04,15.24 ARDUINO_MEGA_1.GND | D-SUB50.29 D-SUB50.28 | D-SUB50.31 D-SUB50.32 | v113.98,29.84 C4.2 v82.23,29.84 | 147.64,53.98 147.64,57.78 142.88,57.78 141.6,59.05 133.99,59.05 133.67,58.74 118.43,58.74 113.98,63.18 113.35,63.18 111.76,61.59 C6.1 110.41,61.57 100.89,61.57 99.9,60.58 99.44,60.58 99.06,60.96 99.06,62.26 101.58,64.77 C1.- | ~NUDEV~1.GND 107.37,80.01 110.49,83.13 C8.1
  Bottom 0.508: ARDUINO_MEGA_1.GND4 78.42,31.75 80.33,29.84 v82.23,29.84
  Bottom 1.27: ~NUDEV~1.GND 92.71,82.55
  other vias: 113.67,43.81 93.98,44.45 94.61,47.62 102.87,47.62 69.22,46.35 55.88,46.35 55.88,50.8 55.88,55.24 55.88,60.33 55.88,64.77 55.24,38.73
  pour Top (isolate 0.254): -20.32,99.69 -20.32,-6.99 118.11,-6.99 118.11,99.69
  pour Bottom (isolate 0.254): -22.86,104.14 -22.86,-10.79 118.11,-10.79 118.11,104.14
GNDA  (via drill 0.3, 0.35)
  Top 1.016: IC2.3 IC2.4 | IC6.3 IC6.4 | IC5.3 IC5.4 | IC9.3 IC9.4 | IC8.3 IC8.4 | IC3.3 120.71,28.32
  Top 1.778: 122.08,29.69 123.19,30.8 123.19,38.1 | 122.08,29.69 120.97,28.57 | 123.19,38.1 121.28,40.01 IC2.4 | 120.97,28.57 IC3.4 | 123.19,50.16 123.83,50.16 123.83,48.9 | 123.19,50.16 IC6.4 | 123.83,38.73 123.83,38.42 123.19,38.1 | 123.83,38.73 123.83,48.9 | 123.19,61.59 IC5.4 | 123.19,50.16 123.19,60.33 | 123.19,60.33 123.19,61.59 | 123.19,71.75 123.83,71.75 123.83,70.48 | 123.19,71.75 IC9.4 | 123.83,70.48 123.83,61.91 123.19,61.59 | IC8.4 v123.19,83.19 123.19,71.75 | 122.08,29.69 v124.14,27.62 | v124.46,38.73 123.83,38.73 | v124.46,48.9 123.83,48.9 | v123.83,60.33 123.19,60.33 | v124.46,70.48 123.83,70.48 | 120.71,28.32 120.97,28.57 | v88.01,79.63 84.05,75.67 ATX.3 | MOT-REL.A1 157.48,19.88 v157.48,29.21
  Bottom 1.778: 165.42,70.48 165.42,60.33 D10.A 165.74,59.69 167.64,57.78 167.64,49.53 165.74,49.53 D16.A 169.23,48.9 170.5,47.62 170.5,39.91 169.32,38.73 D2.A 165.42,38.73 165.42,30.48 | 165.42,70.48 D24.A 165.42,71.12 165.42,81.92 D18.A 164.78,82.55 160.66,86.68 128.59,86.68 125.89,83.98 | 165.42,30.48 165.42,27.36 165.43,27.36 | v124.14,27.62 127.64,27.62 127.95,27.3 D6.A | v124.46,38.73 D4.A | v124.46,48.9 D14.A | v123.83,60.33 D12.A | v124.46,70.48 D22.A | 125.89,83.98 124.78,85.09 123.19,85.09 | 125.89,83.98 127.95,81.92 D20.A | 123.19,85.09 v123.19,83.19 | 123.19,85.09 95.25,85.09 ~NUDEV~1.GNDA 91.9,82.83 91.21,82.83 v88.01,79.63 | ATX.3 ATX.15 | ATX.5 ATX.17 ATX.18 ATX.19 | 165.43,27.36 D8.A | FAN-PWR2.2 165.42,70.48 | v157.48,29.21 158.75,30.48 165.42,30.48 | FAN-PWR1.2 169.49,27.36 165.43,27.36
IM1V  (via drill 0.3)
  Top 0.152: v113.61,38.18 114.3,37.49 115.44,37.49 IC2.7
  Bottom 0.152: v113.61,38.18 110.11,41.68 102.64,41.68 101.58,40.62 69.88,40.62 67.06,43.43 33.76,43.43 29.72,39.4 15.93,39.4 ARDUINO_MEGA_1.A0
IM2V  (via drill 0.3)
  Top 0.152: v113.31,25.98 115.44,25.98 IC3.7 | v106.76,25.76 106.76,33.68 102.64,37.8 v102.64,42.29
  Bottom 0.152: v113.31,25.98 112.85,25.98 112.62,25.76 v106.76,25.76 | v102.64,42.29 98.53,46.41 89.69,46.41 87.86,48.23 19.66,48.23 ARDUINO_MEGA_1.A2
IM3V  (via drill 0.3)
  Top 0.152: IC5.7 112.01,59.05 v110.11,57.15 | v17.98,49.07 15.93,47.02 ARDUINO_MEGA_1.A3
  Bottom 0.152: v110.11,57.15 85.34,57.15 85.04,56.84 66.06,56.84 62.48,53.26 30.71,53.26 26.52,49.07 v17.98,49.07
IM4V  (via drill 0.3)
  Top 0.152: v113.61,47.62 IC6.7
  Bottom 0.152: v113.61,47.62 113.16,47.62 112.24,46.71 89.84,46.71 88.01,48.54 16.92,48.54 15.93,49.53 ARDUINO_MEGA_1.A4
IM5V  (via drill 0.3)
  Top 0.152: v34.82,57.84 34.82,63.4 42.29,70.87 42.29,85.65 44.65,88.01 113.08,88.01 117.2,83.9 117.2,81.84 116.05,80.7 115.52,80.7 IC8.7 | v17.75,50.22 15.93,52.05 ARDUINO_MEGA_1.A5
  Bottom 0.152: v34.82,57.84 27.2,50.22 v17.75,50.22
IM6V  (via drill 0.3)
  Top 0.152: v113.61,62.56 113.61,67.82 114.99,69.19 115.44,69.19 IC9.7
  Bottom 0.152: v113.61,62.56 113.23,62.56 110.87,60.2 93.73,60.2 85.27,68.66 77.34,68.66 71.09,62.41 71.09,60.73 70.64,60.27 66.9,60.27 65,58.37 20.42,58.37 16.69,54.63 15.93,54.63 ARDUINO_MEGA_1.A6
IN1A  (via drill 0.35)
  Top 0.203: ARDUINO_MEGA_1.D22 60.96,81.92 v60.96,35.24
  Bottom 0.203: v60.96,35.24 63.18,33.02 73.34,33.02 74.61,34.29 137.79,34.29 139.7,36.2 MOT12.5
IN1B  (via drill 0.35)
  Top 0.203: ARDUINO_MEGA_1.D23 62.87,83.82 62.87,78.42 66.67,74.61 v66.67,42.55
  Bottom 0.203: v66.67,42.55 67.94,41.27 67.97,41.22 72.77,36.42 97.92,36.42 102.72,41.22 105,41.22 105.09,41.27 110.17,36.2 118.43,36.2 118.75,35.88 137.48,35.88 139.06,37.47 142.56,37.47 143.83,36.2 146.69,36.2 147.64,35.24 147.64,33.66 MOT12.7
IN2A  (via drill 0.35)
  Top 0.203: v62.23,81.28 61.59,80.64 v61.59,33.66
  Bottom 0.203: ARDUINO_MEGA_1.D24 60.33,81.28 v62.23,81.28 | v61.59,33.66 62.87,32.38 116.84,32.38 119.06,30.16 138.75,30.16 139.06,29.84 MOT12.10
IN2B  (via drill 0.35)
  Top 0.203: ARDUINO_MEGA_1.D25 60.33,86.36 67.94,86.36 v67.94,28.26
  Bottom 0.203: v67.94,28.26 121.6,28.26 124.14,25.72 137.16,25.72 138.75,27.3 MOT12.12
IN3A  (via drill 0.35)
  Top 0.203: ARDUINO_MEGA_1.D26 57.78,83.82 57.78,85.41 59.37,87 68.58,87 v68.58,59.69
  Bottom 0.203: v68.58,59.69 70.48,57.78 70.56,57.76 70.94,57.38 85.04,57.38 85.42,57.76 140.28,57.76 MOT34.5
IN3B  (via drill 0.35)
  Top 0.203: v72.07,81.28 72.08,81.23 72.08,75.44 78.79,68.73 79.93,68.73 84.28,64.39 88.92,64.39 96.77,56.54 v96.84,56.52
  Bottom 0.203: ARDUINO_MEGA_1.D27 57.78,83.82 69.53,83.82 v72.07,81.28 | v96.84,56.52 98.11,55.24 MOT34.7
IN4A  (via drill 0.35)
  Top 0.203: ARDUINO_MEGA_1.D28 59.69,76.83 v59.69,52.7
  Bottom 0.203: v59.69,52.7 61.59,50.8 65.09,50.8 66.99,48.9 95.25,48.9 95.57,48.58 112.71,48.58 114.62,50.48 133.99,50.48 138.11,46.35 142.56,46.35 143.83,47.62 146.69,47.62 147.64,48.58 147.64,51.44 MOT34.10
IN4B  (via drill 0.3)
  Top 0.203: ARDUINO_MEGA_1.D29 56.52,87.63 70.17,87.63 70.17,80.96 70.1,80.92 70.1,80.7 69.49,80.09 69.49,64.08 71.09,62.48 71.09,56.46 v70.94,56.31
  Bottom 0.203: MOT34.12 142.88,51.44 139.06,51.44 137.48,53.02 94.61,53.02 91.36,56.31 v70.94,56.31
IN5A  (via drill 0.35)
  Top 0.203: v72.07,87 108.9,87 v108.9,78.11
  Bottom 0.203: ARDUINO_MEGA_1.D49 30.48,87 v72.07,87 | v108.9,78.11 109.54,78.74 139.7,78.74 MOT56.5
IN5B
  Bottom 0.203: ARDUINO_MEGA_1.D48 30.48,80.64 72.07,80.64 74.36,78.36 104.84,78.36 106.36,76.83 MOT56.7
IN6A  (via drill 0.35)
  Top 0.203: ARDUINO_MEGA_1.D47 32.38,83.82 32.38,82.23 v38.42,76.2
  Bottom 0.203: v38.42,76.2 39.37,76.2 40.64,77.47 42.55,77.47 42.8,77.22 93.6,77.22 100.01,70.8 113.03,70.8 113.35,71.12 121.92,71.12 124.14,68.9 134.94,68.9 139.06,73.03 MOT56.10
IN6B
  Bottom 0.203: ARDUINO_MEGA_1.D46 29.84,83.82 20.64,83.82 19.68,82.87 19.68,76.83 37.47,76.83 38.73,78.11 43.18,78.11 43.56,77.72 93.73,77.72 95.89,75.56 142.88,75.56 144.15,74.3 146.69,74.3 147.64,73.34 147.64,70.48 MOT56.12
M1+  (via drill 0.35)
  Top 0.635: D1.A v162.88,38.73 | v167,41.91 167.64,41.27 F1.1 | v152.4,30.16 152.4,28.57 146.69,22.86 146.69,20.95 133.35,20.95 127.51,15.11 127.51,10.16 124.46,10.16 D-SUB50.17
  Bottom 0.635: v167,41.91 162.88,41.91 v162.88,38.73 D1.A 160.97,38.73 v152.4,30.16
M1-  (via drill 0.35)
  Top 0.635: v130.49,38.73 D3.A | v126.68,15.88 132.72,21.91 142.88,21.91 142.88,36.83 140.97,38.73 MOT12.3
  Bottom 0.635: v130.49,38.73 D3.A MOT12.3 | v126.68,15.88 124.78,15.88 124.46,15.56 D-SUB50.50
M1-FUSE  (via drill 0.35)
  Top 0.635: F1.2 v155.26,39.05
  Bottom 0.635: MOT12.2 146.37,39.05 v155.26,39.05
M2+  (via drill 0.35)
  Top 0.635: D5.A v130.49,27.3 129.86,26.67 129.86,25.72 129.54,25.4 125.73,25.4 | F2.1 125.73,25.4 | 125.73,25.4 125.73,13.27 122.62,10.16 121.6,10.16 D-SUB50.16
  Bottom 0.635: v130.49,27.3 D5.A
M2-  (via drill 0.35)
  Top 0.635: v162.88,27.3 D7.A
  Bottom 0.635: MOT12.14 158.43,24.77 160.97,27.3 D7.A v162.88,27.3 163.19,27.3 163.19,17.78 161.29,15.88 139.06,15.88 137.16,17.78 121.92,17.78 121.56,17.42 D-SUB50.49
M2-FUSE
  Top 0.635: MOT12.13 134.3,26.04 134.3,30.8 F2.2
M3+  (via drill 0.35)
  Top 0.635: v162.88,60.33 D9.A 160.97,60.33 160.97,61.59 154.62,61.59 153.35,60.33 153.35,26.35 134.62,7.62 130.18,7.62 129.48,8.32 120.33,8.32 D-SUB50.15 | v166.05,57.15 167.64,55.56 F3.1
  Bottom 0.635: D9.A v162.88,60.33 162.88,57.15 v166.05,57.15
M3-  (via drill 0.35)
  Top 0.635: MOT34.3 134.62,60.33 | 134.62,60.33 D11.A | v118.75,31.75 118.75,15.56 D-SUB50.48 | 134.62,60.33 v134.62,32.07
  Bottom 0.635: MOT34.3 D11.A | v118.75,31.75 119.06,32.07 v134.62,32.07
M3-FUSE  (via drill 0.35)
  Top 0.635: F3.2 v155.26,60.64
  Bottom 0.635: MOT34.2 146.37,60.64 v155.26,60.64
M4+  (via drill 0.35)
  Top 0.635: 132.08,48.9 v130.49,48.9 | F4.1 132.08,48.9 | 132.08,48.9 D13.A | v118.11,42.55 118.11,34.61 117.35,33.85 117.35,15.05 118.75,13.65 118.75,11.94 116.97,10.16 116.2,10.16 D-SUB50.14
  Bottom 0.635: v130.49,48.9 131.44,48.9 | 131.44,48.9 D13.A | v118.11,42.55 122.56,46.99 129.54,46.99 131.44,48.9
M4-  (via drill 0.35)
  Top 0.635: v162.88,48.9 D15.A 160.97,48.9 154.31,42.23 154.31,20.32 150.81,16.83 v149.54,16.83
  Bottom 0.635: v162.88,48.9 D15.A 160.97,48.9 158.43,46.35 MOT34.14 | D-SUB50.47 116.2,15.56 119.7,19.05 143.83,19.05 146.05,16.83 v149.54,16.83
M4-FUSE  (via drill 0.35)
  Top 0.635: v127.32,51.44 125.73,53.02 F4.2
  Bottom 0.635: MOT34.13 139.38,48.58 136.84,48.58 133.99,51.44 v127.32,51.44
M5+  (via drill 0.35)
  Top 0.635: D17.A v162.88,81.92 162.88,80.96 164.85,78.99 167,78.99 167.64,78.36 F5.1 169.54,74.3 169.54,13.65 v168.28,12.38
  Bottom 0.635: v162.88,81.92 D17.A | v168.28,12.38 157.8,1.91 135.25,1.91 128.91,8.26 114.94,8.26 113.35,9.84 D-SUB50.13
M5-  (via drill 0.35)
  Top 0.635: MOT56.3 D19.A | v107.63,78.42 v107.63,20.95
  Bottom 0.635: MOT56.3 D19.A 132.08,81.92 129.54,79.38 108.58,79.38 v107.63,78.42 | v107.63,20.95 113.03,15.56 D-SUB50.46
M5-FUSE  (via drill 0.35)
  Top 0.635: F5.2 v155.26,82.23
  Bottom 0.635: MOT56.2 146.37,82.23 v155.26,82.23
M6+  (via drill 0.35)
  Top 0.635: D21.A v130.49,70.48 | v127.32,73.34 125.73,74.93 F6.1 | v108.9,72.07 108.9,52.07 109.09,51.88 109.09,14.92 110.49,13.53 110.49,10.16 D-SUB50.12
  Bottom 0.635: D21.A v130.49,70.48 130.49,73.34 v127.32,73.34 110.17,73.34 v108.9,72.07
M6-  (via drill 0.35)
  Top 0.635: v162.88,70.48 D23.A | v100.65,25.4 99.06,26.99 99.06,60.64 v99.69,61.28
  Bottom 0.635: v162.88,70.48 D23.A 160.97,70.48 158.43,67.94 MOT56.14 142.24,64.77 113.98,64.77 112.08,62.87 101.28,62.87 v99.69,61.28 | v100.65,25.4 110.49,15.56 D-SUB50.45
M6-FUSE
  Top 0.635: MOT56.13 134.3,69.22 134.3,73.98 F6.2
MOT-EN
  Top 0.152: ARDUINO_MEGA_1.D38 R7.1
MS1
  Top 0.152: ARDUINO_MEGA_1.D37 43.81,86.68 51.44,86.68 52.7,85.41 52.7,6.99 53.34,6.35 89.22,6.35 92.39,9.53 92.39,9.84 95.25,12.7 D-SUB50.23
MS2
  Top 0.152: D-SUB50.7 96.84,10.16 97.47,10.16 98.42,11.11 100.65,11.11 100.65,9.14 96.9,5.4 44.45,5.4 43.81,6.03 ARDUINO_MEGA_1.D36
MS3
  Top 0.152: ARDUINO_MEGA_1.D35 46.35,86.36 49.21,86.36 50.16,85.41 50.16,82.23 50.48,81.92 50.48,6.35 50.8,6.03 91.76,6.03 95.25,9.53 95.25,10.16 97.79,12.7 D-SUB50.24
MS4
  Top 0.152: D-SUB50.8 99.38,9.84 95.25,5.71 46.99,5.71 46.35,6.35 ARDUINO_MEGA_1.D34
MS5  (via drill 0.35)
  Top 0.152: v49.85,19.05 47.62,21.27 47.62,83.82 ARDUINO_MEGA_1.D33
  Bottom 0.152: D-SUB50.6 93.59,9.86 91.19,12.26 91.19,13.27 90.17,14.29 87.63,14.29 87.25,14.67 87.25,16.26 84.45,19.05 v49.85,19.05
MS6  (via drill 0.35)
  Top 0.152: v49.21,24.77 48.9,25.08 ARDUINO_MEGA_1.D32
  Bottom 0.152: v49.21,24.77 52.39,21.59 83.5,21.59 88.27,16.83 89.47,16.83 89.79,16.51 89.79,15.3 92.39,12.7 D-SUB50.22
N$1
  Top 0.203: E-STOP.2 MOT-EN.C
N$2
  Top 0.152: MOT-EN.B 100.33,6.99 98.42,5.08 42.55,5.08 41.27,6.35 R7.2
N$3
  Top 0.152: MOT-EN.E 148.59,14.61 148.59,18.41 MOT-REL.A2
N$4  (via drill 0.35)
  Top 0.152: v112.08,38.73 IC2.6
  Bottom 0.152: v112.08,38.73 110.81,37.47 C3.2
N$5
  Top 0.152: ARDUINO_MEGA_1.RST 9.53,15.24 1.27,15.24 1.27,80.64 8.89,88.27 17.14,88.27 RESET-LOGIC.1
N$6  (via drill 0.35)
  Top 0.152: v113.35,27.3 IC3.6
  Bottom 0.152: C4.1 v113.35,27.3
N$9
  Top 0.152: IC5.6 110.49,60.33 C6.2
N$10  (via drill 0.35)
  Top 0.152: IC6.6 113.67,48.9 v113.67,48.58
  Bottom 0.152: v113.67,48.58 112.71,47.62 C7.1
N$13
  Top 0.152: IC8.6 116.84,81.92 116.84,83.82 111.44,83.82 111.44,81.6 C8.2
N$14  (via drill 0.35)
  Top 0.152: v113.67,70.48 IC9.6
  Bottom 0.152: v113.67,70.48 112.39,69.22 C9.1
PWM1  (via drill 0.35)
  Top 0.203: v74.93,33.66 v73.03,35.56
  Bottom 0.203: ARDUINO_MEGA_1.D5 64.77,38.73 69.85,38.73 v73.03,35.56 | v74.93,33.66 137.79,33.66 139.06,34.92 MOT12.6
PWM2  (via drill 0.35)
  Top 0.203: v87.31,47.62 87.63,47.31 87.63,39.05 v94.93,31.75
  Bottom 0.203: ARDUINO_MEGA_1.D2 65.02,47.88 87.06,47.88 v87.31,47.62 | v94.93,31.75 95.89,30.8 117.79,30.8 119.06,29.53 138.75,29.53 139.7,28.57 MOT12.11
PWM3  (via drill 0.35)
  Top 0.203: v98.17,56.52 98.17,55.63 89.53,46.99 v88.27,46.99
  Bottom 0.203: v88.27,46.99 85.72,44.45 ARDUINO_MEGA_1.D3 | MOT34.6 v98.17,56.52
PWM4  (via drill 0.35)
  Top 0.203: v66.67,38.1 67.31,38.73 v67.31,49.53
  Bottom 0.203: ARDUINO_MEGA_1.D6 65.41,38.1 v66.67,38.1 | v67.31,49.53 70.17,52.39 137.48,52.39 139.7,50.16 MOT34.11
PWM5  (via drill 0.35)
  Top 0.203: v106.36,34.92 106.68,35.24 v106.68,77.47
  Bottom 0.203: ARDUINO_MEGA_1.D7 64.77,34.92 v106.36,34.92 | v106.68,77.47 138.43,77.47 139.06,78.11 MOT56.6
PWM6  (via drill 0.35)
  Top 0.203: v135.25,28.89 137.48,31.11 137.48,57.47 139.06,59.05 142.56,59.05 142.56,69.85 140.65,71.75 MOT56.11
  Bottom 0.203: ARDUINO_MEGA_1.D8 65.72,28.89 v135.25,28.89
RP-ARX/PTX  (via drill 0.35)
  Top 0.152: v31.43,41.91 31.43,69.85 U1.6
  Bottom 0.152: v31.43,41.91 30.16,40.64 6.35,40.64 RASPBERRY-PY.8
RP-ATX/PRX  (via drill 0.35)
  Top 0.152: v32.07,46.35 32.07,69.85 U1.7
  Bottom 0.152: v32.07,46.35 29.53,43.81 17.46,43.81 16.83,43.18 6.35,43.18 RASPBERRY-PY.10
RP-MISO  (via drill 0.35)
  Top 0.152: v29.53,60.33 29.53,69.85 U1.3
  Bottom 0.152: v29.53,60.33 28.89,59.69 RASPBERRY-PY.21
RP-MOSI  (via drill 0.35)
  Top 0.152: v20.64,59.05 20.64,62.23 28.26,69.85 U1.1
  Bottom 0.152: v20.64,59.05 20,58.42 8.89,58.42 RASPBERRY-PY.19
RP-SCK  (via drill 0.35)
  Top 0.152: v30.16,61.59 30.16,69.85 U1.4
  Bottom 0.152: v30.16,61.59 29.53,60.96 8.89,60.96 RASPBERRY-PY.23
RP-SCL  (via drill 0.35)
  Top 0.152: v33.34,41.91 33.34,69.85 U1.9
  Bottom 0.152: v33.34,41.91 29.53,38.1 8.89,38.1 RASPBERRY-PY.5
RP-SDA  (via drill 0.35)
  Top 0.152: v32.7,40.32 32.7,69.85 U1.8
  Bottom 0.152: v32.7,40.32 29.21,36.83 RASPBERRY-PY.3
RP-SS  (via drill 0.35)
  Top 0.152: v30.8,66.67 30.8,69.85 U1.5
  Bottom 0.152: v30.8,66.67 27.62,63.5 6.35,63.5 RASPBERRY-PY.24
SEN_1  (via drill 0.35)
  Top 0.635: 120.65,36.83 120.65,37.47 IC2.2 | 120.65,36.83 120.65,36.2 IC2.1 | v119.06,36.83 120.65,36.83
  Bottom 0.635: v119.06,36.83 123.51,41.27 MOT12.1
SEN_2  (via drill 0.35)
  Top 0.635: IC3.2 120.65,26.04 120.65,24.77 IC3.1 v122.56,24.77
  Bottom 0.635: v122.56,24.77 123.83,23.5 MOT12.15
SEN_3  (via drill 0.35)
  Top 0.635: 120.65,59.05 120.65,57.78 IC5.1 | 120.65,59.05 119.06,59.05 v119.06,59.69 | 120.65,59.05 IC5.2
  Bottom 0.635: v119.06,59.69 122.24,62.87 MOT34.1
SEN_4  (via drill 0.35)
  Top 0.635: IC6.2 120.65,47.62 120.65,46.35 IC6.1 120.97,46.35 v122.24,45.09
  Bottom 0.635: MOT34.15 v122.24,45.09
SEN_5  (via drill 0.35)
  Top 0.635: 120.65,80.64 120.65,79.38 IC8.1 | 120.65,80.64 118.75,80.64 118.75,83.5 120.02,84.77 v128.91,84.77 | 120.65,80.64 IC8.2
  Bottom 0.635: v128.91,84.77 129.22,84.45 MOT56.1
SEN_6  (via drill 0.35)
  Top 0.635: IC9.2 120.65,69.22 120.65,67.94 IC9.1 120.97,67.94 122.24,66.67 v122.24,65.72
  Bottom 0.635: v122.24,65.72 139.38,65.72 MOT56.15
V+  (via drill 0.3, 0.35)
  Top 1.778: ATX.11 84.05,42.06 84.05,46.25 ATX.10 | v101.19,41.99 101.19,28.73 104.78,25.15 v104.78,25.08 | E-STOP.1 153.63,11.03 MOT-REL.14
  Bottom 1.778: v104.78,25.08 107.31,22.54 122.56,22.54 123.83,21.27 158.43,21.27 161.07,18.64 MOT-REL.14 | v101.19,41.99 84.05,41.99 ATX.11
V-OFF  (via drill 0.35)
  Top 0.203: v11.43,33.02 v11.43,41.91 | v11.43,30.48 11.43,24.13 R-OFF.2 3.17,19.05 2.54,19.68 C2.1
  Bottom 0.203: v11.43,41.91 ARDUINO_MEGA_1.A1 | v11.43,30.48 v11.43,33.02
V-REF
  Top 0.152: V-REF.2 75.42,24.77 73.66,24.77 72.39,23.5 72.39,20.32 64.77,12.7
  Top 0.203: 64.77,12.7 ARDUINO_MEGA_1.AREF
VDD  (via drill 0.35)
  Top 1.778: D5.C 128.27,27.3 128.27,38.73 D3.C 127.95,39.37 127.95,48.9 D13.C 128.59,49.53 128.91,49.85 128.91,59.37 128.59,59.69 D11.C 127.95,60.33 127.95,67.31 | 127.95,67.31 127.95,70.48 D21.C 128.59,71.12 128.91,71.44 128.91,81.28 128.27,81.92 D19.C 128.91,82.23 129.86,83.19 129.86,83.5 133.03,86.68 148.59,86.68 | v127.32,67.31 127.95,67.31 | MOT12.4 148.59,37.47 148.59,57.15 148.11,57.63 | 148.11,57.63 146.69,59.05 MOT34.4 | 148.59,80.64 MOT56.4 | 148.59,73.03 148.59,58.1 148.11,57.63 | 148.59,73.03 148.59,80.64 | 163.83,11.11 164.78,12.06 164.78,26.67 D7.C 165.1,27.3 165.1,38.73 D1.C 165.42,39.37 165.42,48.9 D15.C 164.78,49.53 164.47,49.85 164.47,59.37 164.78,59.69 D9.C 165.42,60.33 165.42,70.48 D23.C 165.1,71.12 165.1,73.03 148.59,73.03 | 163.83,11.11 MOT-REL.11 | 148.59,80.64 148.59,86.68 | 148.59,86.68 161.61,86.68 164.59,83.69 164.59,83.67 165.4,82.87 D17.C 165.1,81.92 166.24,80.77 168.78,80.77 172.09,77.47 FAN-PWR2.1 | 163.83,11.11 164.78,10.16 168.91,10.16 172.09,13.34 FAN-PWR1.1
  Bottom 1.778: C1.+ 99.06,67.31 v127.32,67.31
VLED1
  Top 0.203: R1.2 104.78,21.59 106.43,19.94 106.43,14.61 107.76,13.27 D-SUB50.11
VLED2
  Bottom 0.203: R2.2 98.74,18.1 104.14,18.1 106.36,15.88 106.36,12.7 D-SUB50.27
VLED3
  Top 0.203: R3.2 96.84,17.46 103.82,17.46 103.82,14.61 105.03,13.4 105.03,9.88 D-SUB50.10
VLED4
  Bottom 0.203: R4.2 92.39,16.83 102.55,16.83 103.82,15.56 103.82,12.7 D-SUB50.26
VLED5
  Top 0.203: R5.2 94.93,16.83 100.97,16.83 100.97,14.8 102.23,13.53 D-SUB50.9
VLED6
  Bottom 0.203: R6.2 89.22,17.46 91.19,17.46 92.58,16.07 92.58,14.73 93.34,13.97 99.38,13.97 100.65,12.7 D-SUB50.25
(copper drawn outside any net)
  shapes: Bottom area x5

## Text on the board
tPlace: +3.3V | +3.3V | +3.3V | GND | GND | PS-ON | +5V | GND | GND | GND | +5V | GND | GND | +5V | +5V-STB | +5V | +12V | +5V | +12V | GND | +3.3V
bPlace: +3.3V | +3.3V | +3.3V | GND | GND | PS-ON | +5V | GND | GND | GND | +5V | GND | GND | +5V | +5V-STB | +5V | +12V | +5V | +12V | GND | +3.3V
tNames: +12V | GND | GND | +12V
200bmp: Developed by: / Emanuele Alfano / Ing. 3° anno 2019 | Università degli studi / Tor Vergata
201bmp: Università degli studi / Tor Vergata | Developed by: / Emanuele Alfano / Ing. 3° anno 2019